# Altium PCB hat.PcbDoc (part 2 of 2)
Units mm, origin at the board's own origin, x right, y up, seen from the top; angles counter-clockwise.
Board outline 64 x 85 mm, 4 copper layers (Top Layer, Ground Plane, Power Plane, Bottom Layer), stack 0.844 mm thick; 120 components, 68 nets, 381 pads, 144 vias.
Unrouted connection lines stored in the file: 19.
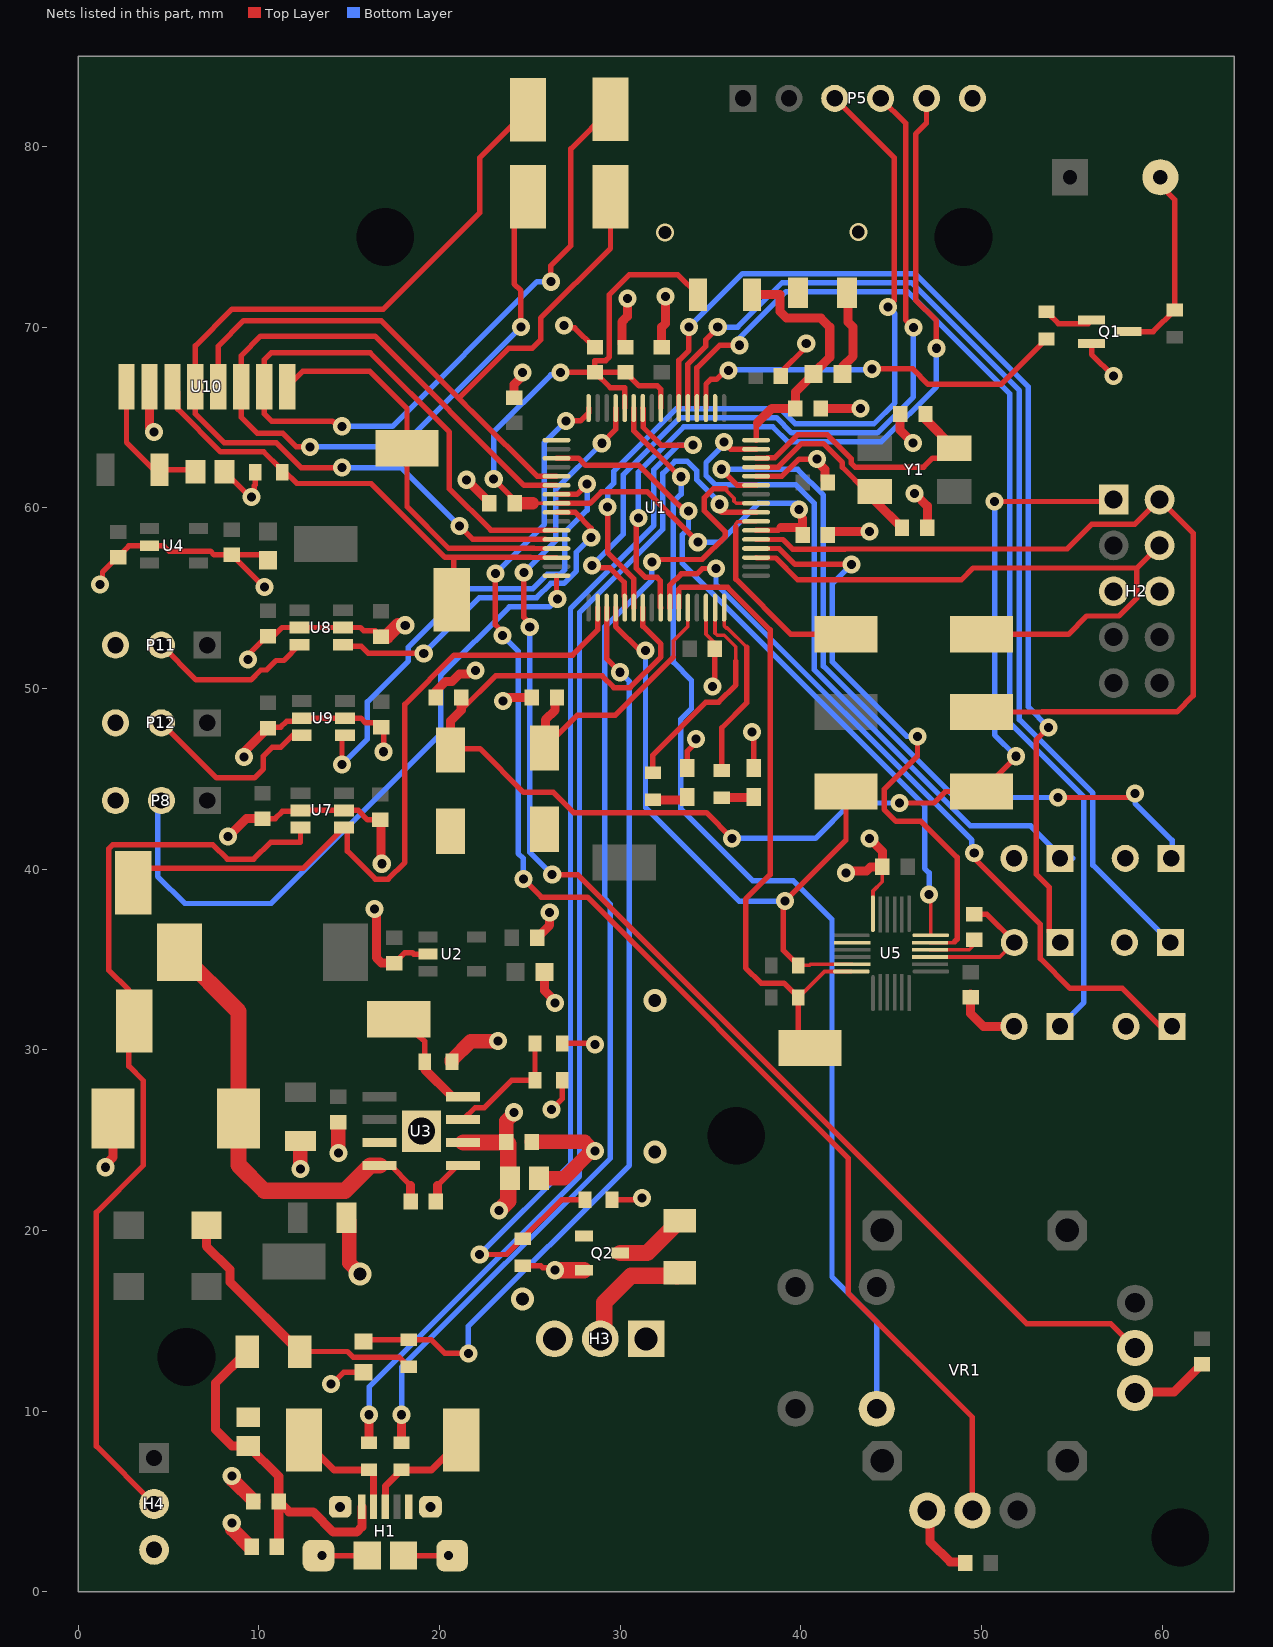
[diagram p4: the nets of this part, all layers, seen from the top]

## Via types
v1: diameter 1, hole 0.5, Top Layer to Bottom Layer, 136 vias
v2: diameter 1.27, hole 0.711, Top Layer to Bottom Layer, 4 vias
v3: diameter 1, hole 0.711, Top Layer to Bottom Layer, 2 vias
v4: diameter 1.3, hole 1.1, Top Layer to Bottom Layer, 1 vias
v5: diameter 2, hole 1.5, Top Layer to Bottom Layer, 1 vias

## Nets (pads, with @x,y where several pads share a name; then routed paths per layer and width w, separated by ;. In a path a pad name is that pad's centre, name@x,y a point inside that pad or via, vN(x,y) a via of type N, cw(c..) or ccw(c..) an arc to the next point about the centre after c; other vN are vias at no path point) (continued)
6V: C1.2 C30.2 Q2.2 R3.2 R29.2 R31.2 U3.2 | length 16.5
  Top Layer w0.3: R3.2@24.9,18.05 25.6,18.05 25.716,17.934 26.266,17.934 v1(26.4,17.8) ; v1(26.2,26.7) 26.785,27.285 R29.2@26.785,28.321
  Top Layer w0.8: R31.2@20.689,29.337 20.689,29.437 21.732,30.48 v1(23.241,30.48) ; C30.2@23.7,24.9 23.7,26.059 24.13,26.489 v1(24.13,26.543)
  Top Layer w0.9: U3.2@21.311,24.865 23.665,24.865 C30.2@23.7,24.9 23.8,24.8 23.8,23 C1.2@23.9,22.9 23.8,22.8 23.8,21.627 23.3,21.127 v1(23.3,21.1) ; v1(26.4,17.8) Q2.2@28,17.8
BAT_DIV: R3.1 R4.2 U1.10 | length 61.5
  Top Layer w0.3: v1(22.225,18.669) 23.719,18.669 R3.1@24.6,19.55 26.75,21.7 R4.2@28.05,21.7 ; U1.10@31.25,65.525 31.275,65.5 31.275,64.461 32.262,63.475 v1(34.036,63.475)
  Bottom Layer w0.3: v1(22.225,18.669) 27.25,23.694 27.25,54.42 31.859,59.029 31.859,62.115 33.219,63.475 v1(34.036,63.475)
BUZZER_PWM: R22.2 U1.3 | length 21.9
  Top Layer w0.3: U1.3@34.75,65.525 34.75,66.85 35.012,67.112 35.323,67.112 35.811,67.6 v1(36,67.6) ; v1(43.942,67.691) 46.201,67.691 47.051,66.841 51.091,66.841 R22.2@53.6,69.35
  Bottom Layer w0.3: v1(36,67.6) 36.045,67.645 43.896,67.645 v1(43.942,67.691)
CH1_SEL: P2.1 U1.63 | length 38.7
  Top Layer w0.3: v1(35.738,63.64) 36.127,63.25 U1.63@37.525,63.25
  Bottom Layer w0.3: v1(35.738,63.64) 35.738,63.5 34.75,62.512 34.75,61.784 35.248,61.286 39.716,61.286 40.75,60.252 40.75,51.034 49.384,42.4 52.716,42.4 53.916,41.2 54.44,41.2 P2.1@55.04,40.6
CH2_SEL: P3.1 U1.59 | length 42.9
  Top Layer w0.3: v1(35.6,62.136) 36.486,61.25 U1.59@37.525,61.25 ; v1(54.229,43.967) 58.267,43.967 v1(58.5,44.2)
  Bottom Layer w0.3: v1(35.6,62.136) 39.823,62.136 41.25,60.709 41.25,51.241 48.523,43.967 v1(54.229,43.967) ; v1(58.5,44.2) 58.5,43.647 60.554,41.593 60.554,40.846 P3.1@60.8,40.6
CH3_SEL: P4.1 U1.6 | length 60
  Top Layer w0.3: U1.6@33.25,65.525 33.25,68.164 33.8,68.714 v1(33.8,70) ; v1(53.721,47.854) 53.035,47.168 53.035,39.713 53.756,38.992 53.756,36.541 P4.1@54.356,35.941
  Bottom Layer w0.3: v1(33.8,70) 36.77,72.97 46.326,72.97 52.595,66.7 52.595,48.979 v1(53.721,47.854) ; P4.1@53.9,35.485 P4.1@54.356,35.941
CH4_SEL: P6.1 U1.5 | length 59.4
  Top Layer w0.3: U1.5@33.75,65.525 33.75,67.957 34.746,68.954 34.746,69.31 35.4,69.964 v1(35.4,70)
  Bottom Layer w0.3: v1(35.4,70) 36.501,70 38.971,72.47 46.119,72.47 52.095,66.493 52.095,48.277 56.165,44.208 56.165,40.228 P6.1@60.452,35.941
D_N: H1.2 R24.1 TP4.1 | length 6.4
  Top Layer w0.381: TP4.1@12.5,8.4 14.15,6.75 R24.1@16.1,6.75 16.35,6.5 H1.2@16.35,4.7
D_P: H1.3 R8.1 TP5.1 | length 6.4
  Top Layer w0.381: H1.3@17.009,4.691 H1.3@17,4.7 17,5.85 R8.1@17.9,6.75 19.55,6.75 TP5.1@21.2,8.4
FSYNC: U1.52 U5.11 | length 33.9
  Top Layer w0.2: U5.11@47.143,35.935 48.464,35.935 48.514,35.985
  Top Layer w0.3: U1.52@37.525,57.75 38.798,57.75 39.677,56.871 v1(42.799,56.871) ; v1(46.457,47.346) 46.457,46.257 44.616,44.416 44.616,43.311 45.277,42.65 46.652,42.65 48.65,40.652 48.65,36.121 48.514,35.985
  Bottom Layer w0.3: v1(42.799,56.871) 41.75,55.822 41.75,51.468 45.872,47.346 v1(46.457,47.346)
GND: C1.1 C2.1 C3.1 C4.1 C5.1 C6.1 C7.1 C8.1 C9.1 C10.1 C11.1 C12.1 C13.1 C14.1 C16.1 C17.1 C18.2 C19.1 C20.1 C21.1 C22.1 C23.1 C25.1 C26.1 C27.1 C28.1 C29.1 C30.1 C31.2 C32.1 C33.1 C34.2 C35.1 C36.2 C37.1 C38.2 C39.2 C40.2 C41.1 C42.1 D1.1 DL1.1 DL2.1 H1.5 H1.6 H2.5 H2.6 H3.1 H3.3 H4.3 P2.2 P3.2 P4.2 P5.6 P6.2 P7.2 P8.3 P11.3 P12.3 P13.2 pad.2@36.424,25.248 pad.2@49,75 Q1.2 Q2.1 R2.1 R4.1 R23.1 R27.1 R34.1 S1.1 S2.1 U1.2 U1.17 U1.46 U1.60 U2.2 U3.7 U3.EPAD U4.2 U5.9 U5.18 U5.20 U7.2 U7.5 U8.2 U8.5 U9.2 U9.5 U10.2 VR1.3 VR1.6 | length 163.8
  Top Layer w0.2: U1.46@34.75,54.475 34.75,52.998 35.201,52.547 35.244,52.547 C8.1@35.244,52.197 ; v1(35.1,50.1) v1@35.244,50.244 ; U5.18@43.993,37.535 43.993,38.789 44.512,39.309 C18.2@44.512,40.132 ; U5.9@47.411,35.135 51.01,35.135 P4.2@51.816,35.941 P4.2@51.816,35.982
  Top Layer w0.3: v1(1.21,55.763) 1.344,55.897 1.344,56.447 2.16,57.263 C16.1@2.21,57.263 ; C16.1@2.1,57.2 2.8,57.9 U4.2@3.95,57.9 4.725,57.9 5.025,57.6 7.32,57.6 7.52,57.4 C23.1@8.5,57.4 ; C21.1@8.1,62.5 C21.1@8.1,62 9.5,60.6 v1(9.6,60.6) 9.734,60.734 9.734,61.219 9.791,61.276 R27.1@9.791,61.976 ; C23.1@8.8,57.15 C23.1@8.55,57.4 ; v1(9.403,51.6) 9.537,51.734 9.537,51.984 C34.2@10.453,52.9 ; C38.2@10.203,42.8 10.903,42.8 11.303,43.2 12.253,43.2 U7.2@12.303,43.25 U7.5@14.703,43.25 15.503,43.25 16.019,42.734 C37.1@16.713,42.734 ; v1(10.312,55.626) 10.274,55.626 C23.1@8.5,57.4 ; C36.2@10.377,47.858 11.206,47.858 11.531,48.183 12.202,48.183 U9.2@12.377,48.358 U9.5@14.777,48.358 15.645,48.358 15.903,48.1 16.535,48.1 C35.1@16.777,47.858 16.903,47.732 v1(16.903,46.5) ; C34.2@10.403,52.9 C34.2@10.453,52.9 ; C17.1@10.5,57.1 10.2,57.4 C23.1@8.55,57.4 ; H1.6@13.5,2 H1.6@16,2 ; v1(14,11.5) 14.043,11.5 14.693,12.15 R2.1@15.8,12.15 ; C33.1@16.756,52.875 16.431,53.2 15.803,53.2 15.628,53.375 U8.5@14.656,53.375 U8.2@12.256,53.375 11.279,53.375 10.803,52.9 C34.2@10.503,52.9 C34.2@10.453,52.9 ; C3.1@17.5,34.8 18.077,35.377 18.498,35.377 18.575,35.3 U2.2@19.35,35.3 ; H1.6@18,2 H1.6@20.5,2 ; R34.1@26.785,30.353 28.547,30.353 v1(28.6,30.3) ; v1(26.9,70.1) 27.034,69.966 27.484,69.966 28.55,68.9 C11.1@28.6,68.9 ; R4.1@29.55,21.7 31.1,21.7 v1(31.2,21.8) ; DL2.1@33.717,45.6 33.717,46.528 34.2,47.011 v1(34.2,47.2) ; v1@35.244,50.244 C8.1@35.244,52.197 ; v1(37.3,47.6) 37.4,47.5 DL1.1@37.4,45.6 ; U1.60@37.525,61.75 38.955,61.75 39.905,62.7 40.765,62.7 v1@40.9,62.565 ; C5.1@38.9,67.3 38.9,67.511 40.3,68.911 v1(40.3,69.1) v1@40.111,69.1 ; v1@43.2,65.5 v1(43.3,65.5) ; C20.1@49.6,37.498 50.3,37.498 P4.2@51.816,35.982 ; Q1.2@56.1,69.1 56.1,68.5 v1(57.3,67.3) ; C23.1@8.5,57.4 C23.1@8.55,57.4
  Top Layer w0.5: v1(1.5,23.5) 1.5,23.635 1.925,24.06 D1.1@1.925,26.2 ; U10.2@3.943,66.7 3.943,64.457 v1(4.2,64.2) ; v1(8.303,41.8) 9.303,42.8 C38.2@10.203,42.8 ; v1(9.169,46.203) 9.169,46.466 C36.2@10.503,47.8 ; v1(16.4,37.8) 16.5,37.7 16.5,35.1 16.8,34.8 C3.1@17.5,34.8 ; v1@16.555,40.345 v1@16.6,40.3 ; C37.1@16.713,42.734 16.758,42.689 v1@16.758,40.345 ; C39.2@19.803,49.5 19.803,49.85 20.353,50.4 20.703,50.4 21.103,50.8 21.614,50.8 21.814,51 v1(22.003,51) ; v1(21.5,61.554) 22.755,60.299 C12.1@22.755,60.249 ; v1(23.503,49.3) 23.603,49.3 23.803,49.5 C40.2@25.103,49.5 ; C7.1@24.13,66.105 24.13,66.841 24.6,67.311 v1(24.6,67.5) ; C22.1@25.4,36.2 26.1,36.9 v1(26.1,37.6) ; C4.1@25.8,34.3 25.8,33.289 26.4,32.689 v1(26.4,32.595) v1@26.4,32.405 ; C10.1@30.3,68.9 30.1,69.1 30.1,70.3 30.4,70.6 v1(30.4,71.6) ; C6.1@32.3,68.9 32.3,70 32.5,70.2 v1(32.5,71.7) ; v1@40.9,62.565 41.35,62.115 41.35,61.55 C9.1@41.5,61.4 ; C14.1@41.1,65.5 v1@43.2,65.5 ; C13.1@41.5,58.5 41.7,58.7 v1(43.8,58.7) ; v1(42.5,39.8) 42.596,39.896 43.626,39.896 43.862,40.132 C18.2@44.512,40.132 44.512,40.988 v1(43.8,41.7) ; C2.1@45.5,65.2 45.5,64.3 v1(46.2,63.6) ; v1(46.3,60.8) 47,60.1 C25.1@47,58.9 ; VR1.6@47,4.5 47.161,4.339 47.161,2.75 48.26,1.651 49.049,1.651 C32.1@49.1,1.6 ; C19.1@49.4,33.1 49.4,32 50.1,31.3 P7.2@51.8,31.3 ; VR1.3@58.5,11 58.55,11.05 60.65,11.05 C41.1@62.2,12.6
  Top Layer w0.8: v1(8.5,3.8) 8.538,3.762 8.538,3.462 C29.1@9.5,2.5 ; v1(8.5,6.4) 8.538,6.362 8.538,6.212 9.7,5.05 C28.1@9.7,5 ; v1(12.3,23.4) C26.1@12.3,24.95 ; v1(14.4,24.3) C31.2@14.4,26 ; C27.1@14.85,20.7 15,20.55 15,18.2 v2(15.6,17.6) ; C33.1@16.756,52.875 17.079,52.875 17.703,53.5 v1(18.103,53.5) ; C30.1@25.1,24.9 28.046,24.9 v1@28.546,24.4 ; C1.1@25.5,22.9 26.9,22.9 28.4,24.4 v1@28.546,24.4 ; v1(28.6,24.4) v1@28.546,24.4
  other v1: 16.803,40.3 40.9,62.7
  other v2: 24.6,16.2 31.916,24.334 31.916,32.734
  other v3: 32.487,75.235 43.18,75.26
  other v5: 19,25.5
GPIO_JUMPER: P13.1 U1.42 | length 42.9
  Top Layer w0.3: U1.42@32.75,54.475 32.75,55.717 33.383,56.35 34.252,56.35 34.544,56.642 v1(35.306,56.642) ; v1(49.6,40.9) 49.6,40.6 53.256,36.944 53.256,35.046 54.902,33.4 57.8,33.4 60,31.2 P13.1@60.5,31.2
  Bottom Layer w0.3: v1(35.306,56.642) 35.306,55.771 49.466,41.611 49.466,41.034 v1(49.6,40.9) ; P13.1@60.54,31.3 P13.1@61.14,31.9
IMU_IRQ: U1.19 U5.12 | length 38.2
  Top Layer w0.2: v1(47.1,38.6) 47.193,38.507 U5.12@47.193,36.335
  Top Layer w0.3: U1.19@26.475,62.75 27.686,62.75 28.079,62.357 31.031,62.357 33.201,60.186 33.223,60.186 33.593,59.817 v1(33.782,59.817)
  Bottom Layer w0.3: v1@33.445,59.684 33.649,59.684 v1(33.782,59.817) 33.782,58.855 33.445,58.518 33.445,56.924 46.85,43.52 46.85,40.048 47.1,39.798 v1(47.1,38.6)
IMU_JOY_SEL: P7.1 U1.4 | length 61.1
  Top Layer w0.3: U1.4@34.25,65.525 34.25,67.75 35.5,69 v1(36.6,69)
  Bottom Layer w0.3: v1(36.6,69) 36.6,69.391 39.179,71.97 45.911,71.97 51.574,66.308 51.574,48.092 55.665,44 55.665,32.625 P7.1@54.34,31.3
JSSW: U1.11 VR1.7 | length 63.2
  Top Layer w0.3: U1.11@30.75,65.525 30.75,64.279 33.307,61.722 v1(33.376,61.722)
  Bottom Layer w0.3: v1(33.376,61.722) 33.376,60.758 32.932,60.314 32.932,57.594 32.944,57.582 32.944,51.458 33.95,50.452 33.95,48.888 33.35,48.288 33.35,43.348 37.328,39.37 39.573,39.37 41.724,37.219 41.724,17.437 44.2,14.961 VR1.7@44.2,10.13
LED_DATA_3V3: TP14.1 U1.34 U7.4 | length 40.9
  Top Layer w0.3: TP14.1@3.05,39.25 3.85,40.05 12.453,40.05 U7.4@14.703,42.3 14.903,42.1 14.903,40.998 16.451,39.45 17.155,39.45 18.077,40.371 18.077,49.118 20.808,51.85 27.364,51.85 28.75,53.237 U1.34@28.75,54.475
LED_DATA_5V: H4.2 TP15.1 U7.3 | length 51.7
  Top Layer w0.3: H4.2@4.2,4.86 1,8.06 1,21 3.6,23.6 3.6,28.3 2.8,29.1 2.8,33.3 1.7,34.4 1.7,41.145 1.905,41.35 7.451,41.35 8.251,40.55 9.714,40.55 10.664,41.5 12.303,41.5 U7.3@12.303,42.3
MISO: TP23.1 U1.27 U10.7 | length 55.6
  Top Layer w0.3: v1(14.605,64.516) 14.351,64.516 14.067,64.8 10.7,64.8 10.3,65.2 U10.7@10.3,66.7 10.3,68.2 10.68,68.58 16.165,68.58 20.55,64.195 20.55,61.05 22.837,58.763 26.462,58.763 U1.27@26.475,58.75 ; v1(26.162,72.517) 26.162,73.406 27.269,74.513 27.269,79.872 TP23.1@29.464,82.067
  Bottom Layer w0.3: v1(14.605,64.516) 17.399,64.516 25.4,72.517 v1(26.162,72.517)
MOSI: TP18.1 U1.22 U10.6 | length 51.3
  Top Layer w0.3: v1(12.827,63.373) 12.079,63.373 11.317,64.135 9.906,64.135 9.029,65.012 U10.6@9.029,66.7 9.029,68.429 10.1,69.5 16.424,69.5 24.674,61.25 U1.22@26.475,61.25 ; v1(24.5,70) 24.5,72.02 24.13,72.39 24.13,76.454 TP18.1@24.892,77.216
  Bottom Layer w0.3: v1(12.827,63.373) 17.873,63.373 v1(24.5,70)
NetC2_2: C2.2 U1.62 Y1.3 | length 15.1
  Top Layer w0.3: U1.62@37.525,62.75 38.125,62.75 38.15,62.775 38.557,62.775 39.832,64.05 41.459,64.05 42.8,62.709 42.8,62.455 43.005,62.25 46.8,62.25 47.3,62.75 47.95,62.75 Y1.3@48.5,63.3
  Top Layer w0.5: C2.2@46.9,64.9 Y1.3@48.5,63.3
NetC10_2: C10.2 C11.2 C12.2 C13.2 L1.2 U1.8 U1.12 U1.24 U1.54 | length 52.2
  Top Layer w0.2: 25.146,60.249 25.147,60.25 U1.24@26.475,60.25
  Top Layer w0.3: v1(23,61.6) 24.155,60.445 C12.2@24.155,60.249 ; U1.24@26.475,60.25 28.322,60.25 28.957,60.885 31.507,60.885 v1(34.295,58.097) ; v1(26.7,67.5) C11.2@28.6,67.5 ; U1.12@30.25,65.525 30.25,66.65 29.45,66.65 C11.2@28.6,67.5 ; U1.8@32.25,65.525 32.25,66.56 32.06,66.75 31.05,66.75 C10.2@30.3,67.5 C11.2@28.6,67.5 ; L1.2@34.3,71.8 33.2,72.9 30.498,72.9 29.4,71.802 29.4,68.355 29.195,68.15 28.6,68.15 C11.2@28.6,67.5 ; U1.54@37.525,58.75 38.75,58.75 38.9,58.9 ; v1(39.9,59.9) 39.9,59.6 40.1,59.4
  Top Layer w0.5: 38.9,58.9 C13.2@39.8,58.9 ; C13.2@40.1,58.5 40.1,59.4
  Top Layer w0.6: C12.2@24.155,60.249 C12.2@24.157,60.25
  Top Layer w0.7: C12.2@24.157,60.25 25.147,60.25
  Bottom Layer w0.3: v1(23,61.6) 23,64.202 26.164,67.366 26.566,67.366 v1(26.7,67.5) ; v1(34.295,58.097) 35.497,58.097 35.541,58.141 37.65,60.25 v1@39.8,60.25
NetC14_2: C14.2 C15.2 L1.1 U1.64 | length 14.3
  Top Layer w0.3: U1.64@37.525,63.75 37.525,64.625 37.6,64.7
  Top Layer w0.5: L1.1@37.3,71.8 38.85,71.8 38.85,70.864 39.214,70.5 41.107,70.5 41.6,70.007 41.6,68.336 40.7,67.436 C15.2@40.7,67.4 39.7,66.4 C14.2@39.7,65.5 38.4,65.5 37.6,64.7
NetC15_1: C15.1 R23.2 | length 4.9
  Top Layer w0.5: C15.1@42.3,67.4 42.3,67.8 42.9,68.4 42.9,70 42.6,70.3 42.6,71.85 R23.2@42.55,71.9
NetC20_2: C20.2 U5.10 | length 2.7
  Top Layer w0.2: U5.10@47.143,35.535 49.316,35.535 C20.2@49.657,35.876
NetC21_2: C21.2 L3.1 U10.1 | length 7.6
  Top Layer w0.3: U10.1@2.671,66.7 2.671,63.629 4.2,62.1 L3.1@4.5,62.1 6.4,62.1 C21.2@6.5,62
NetC24_1: C24.1 U3.1 | length 2.8
  Top Layer w0.3: C24.1@19.8,21.6 C24.1@19.9,21.7 ; 19.9,22.5 20.995,23.595 U3.1@21.311,23.595
  Top Layer w0.5: C24.1@19.9,21.7 19.9,22.5
NetC24_2: C24.2 D1.2 L2.1 U3.8 | length 25.2
  Top Layer w0.3: U3.8@16.689,23.595 17.305,23.595 18.4,22.5
  Top Layer w0.5: C24.2@18.4,21.6 18.4,22.5
  Top Layer w0.9: L2.1@5.6,35.4 8.875,32.125 D1.2@8.875,26.2 8.875,23.625 10.3,22.2 14.769,22.2 16.164,23.595 U3.8@16.689,23.595
NetC25_2: C25.2 U1.61 Y1.1 | length 11
  Top Layer w0.3: U1.61@37.525,62.25 38.739,62.25 40.039,63.55 41.252,63.55 42.3,62.502 42.3,62.248 43.648,60.9 Y1.1@44.1,60.9
  Top Layer w0.5: Y1.1@44.1,60.9 44.1,60.4 C25.2@45.6,58.9
NetD2_2: D2.2 F2.1 R1.2 | length 15.5
  Top Layer w0.3: F2.1@12.25,13.3 14.905,13.3 15.228,12.977 17.773,12.977 R1.2@18.3,12.45
  Top Layer w0.5: D2.2@7.1,20.3 7.1,19.136 8.39,17.846 8.39,17.16 F2.1@12.25,13.3
NetDL1_2: DL1.2 R5.1 | length 1.8
  Top Layer w0.3: DL1.2@37.361,43.961 DL1.2@37.4,44
  Top Layer w0.5: R5.1@35.622,43.961 DL1.2@37.361,43.961
NetDL2_2: DL2.2 R6.1 | length 2
  Top Layer w0.3: DL2.2@33.551,43.834 DL2.2@33.717,44 DL2.2@33.717,44.05
  Top Layer w0.5: R6.1@31.812,43.834 DL2.2@33.551,43.834
NetF1_1: F1.1 H3.2 | length 7.2
  Top Layer w0.9: H3.2@28.9,14 29.117,14.217 29.117,16.017 30.6,17.5 F1.1@33.15,17.5
  Top Layer w1: H3.2@28.9,14 H3.2@28.9,14.279 ; F1.1@33.15,17.5 F1.1@33.3,17.65
NetF1_2: F1.2 Q2.3 | length 4
  Top Layer w0.9: Q2.3@30,18.75 31.5,18.75 F1.2@33.3,20.55
NetP9_2: P9.2 Q1.3 R21.1 | length 10.8
  Top Layer w0.3: Q1.3@58.1,69.75 59.5,69.75 R21.1@60.7,70.95 60.7,77.049 59.9,77.849 P9.2@59.9,78.3
NetQ1_1: Q1.1 R22.1 | length 2.9
  Top Layer w0.3: R22.1@53.6,70.85 54.25,70.2 55.9,70.2 Q1.1@56.1,70.4
NetR8_2: R8.2 U1.57 | length 65.6
  Top Layer w0.2: 35.852,61.05 35.852,60.979 36.3,60.531 36.3,60.367 36.417,60.25 U1.57@37.525,60.25
  Top Layer w0.3: v1(31.75,56.998) 31.894,57.142 34.542,57.142 35.825,58.425 35.825,58.673 34.65,59.848 34.65,60.552 35.148,61.05 35.852,61.05
  Top Layer w0.5: R8.2@17.9,8.25 v1(17.9,9.8)
  Bottom Layer w0.3: v1(17.9,9.8) 17.9,12.435 29.45,23.985 29.45,38.067 29.15,38.367 29.15,53.407 31.75,56.007 v1(31.75,56.998)
NetR24_2: R24.2 U1.56 | length 67.5
  Top Layer w0.3: v1(35.5,60.2) 35.5,59.87 35.62,59.75 U1.56@37.525,59.75
  Top Layer w0.5: R24.2@16.1,8.25 v1(16.1,9.8)
  Bottom Layer w0.3: v1(16.1,9.8) 16.1,11.342 27.75,22.992 27.75,54.213 32.359,58.822 32.359,61.908 33.024,62.572 33.728,62.572 34.25,62.05 34.25,61.542 35.5,60.292 v1(35.5,60.2)
NetR29_1: R29.1 R34.2 U3.3 | length 6.9
  Top Layer w0.3: U3.3@21.311,26.135 21.977,26.801 22.483,26.801 24.003,28.321 R29.1@25.285,28.321 R34.2@25.285,30.353
NetR31_1: R31.1 TP10.1 U3.4 | length 7.7
  Top Layer w0.3: TP10.1@17.739,31.692 18.67,31.692 TP10.1@18.87,31.492 ; TP10.1@17.907,31.75 17.808,31.75 17.67,31.75 17.808,31.633 19.189,30.468 R31.1@19.189,29.337 ; U3.4@20.695,27.405 U3.4@21.311,27.405
  Top Layer w0.5: R31.1@19.189,29.337 19.189,28.911 U3.4@20.695,27.405
NetTP2_1: TP2.1 U1.55 | length 11.6
  Top Layer w0.2: 36.4,58.947 36.4,59.123 36.517,59.24 37.515,59.24 U1.55@37.525,59.25
  Top Layer w0.3: 36.4,58.947 36.4,56.553 36.4,56.053 39.453,53 TP2.1@42.5,53
nRST: C39.1 H2.1 S1.2 TP19.1 U1.39 | length 75.9
  Top Layer w0.3: S1.2@20.603,46.798 20.474,46.669 22.234,46.669 24.652,44.251 26.307,44.251 27.424,43.134 34.766,43.134 v1(36.2,41.7) ; 21.203,48.8 23.102,50.698 29,50.698 29.648,50.05 30.552,50.05 32.25,51.748 32.25,52.452 31.25,53.452 U1.39@31.25,54.475 ; v1(45.466,43.663) 47.363,43.663 48,44.3 TP19.1@50,44.3 51.9,46.2 v1(51.9,46.25) ; v1(50.724,60.35) 57.206,60.35 H2.1@57.316,60.46
  Top Layer w0.5: S1.2@20.603,46.798 20.603,48.2 21.203,48.8 C39.1@21.203,49.5
  Bottom Layer w0.3: v1(36.2,41.7) 40.8,41.7 42.763,43.663 v1(45.466,43.663) ; v1(50.724,60.35) 50.724,47.426 v1(51.9,46.25) ; H2.1@57.206,60.35 H2.1@57.316,60.46
PA27: P5.4 U1.37 | length 45.1
  Top Layer w0.3: v1(28.448,56.82) 28.582,56.686 29.42,56.686 30.225,55.881 30.225,55.1 30.25,55.075 U1.37@30.25,54.475 ; P5.4@44.418,82.668 45.796,81.29 45.796,70.409 v1(46.228,69.977)
  Bottom Layer w0.3: v1(28.448,56.82) 30.159,58.531 30.159,59.796 30.159,61.829 33.32,64.99 38.652,64.99 39.491,64.15 44.243,64.15 46.228,66.135 v1(46.228,69.977)
PA28: P5.3 U1.38 | length 44.6
  Top Layer w0.3: v1(29.309,60.035) 29.309,57.529 30.75,56.088 U1.38@30.75,54.475 ; P5.3@41.878,82.668 45.161,79.385 45.161,71.45 v1(44.831,71.12)
  Bottom Layer w0.3: v1(29.309,60.035) 29.309,61.021 29.642,61.354 29.642,62.019 33.113,65.49 38.859,65.49 39.698,64.65 44.036,64.65 45.2,65.814 45.2,70.751 v1(44.831,71.12)
PA29: P5.5 U1.41 | length 44.3
  Top Layer w0.3: v1(31.009,59.444) 30.9,59.335 30.9,56.646 31.398,56.148 32.041,56.148 32.225,55.964 32.225,54.5 U1.41@32.25,54.475 ; P5.5@46.958,82.668 46.958,81.296 46.355,80.692 46.355,71.501 47.498,70.358 v1(47.498,68.834)
  Bottom Layer w0.3: v1(31.009,59.444) 31.009,61.972 33.527,64.49 38.444,64.49 39.284,63.65 44.45,63.65 47.498,66.698 v1(47.498,68.834)
RADIO_CE: R27.2 TP22.1 U1.30 U10.3 | length 28
  Top Layer w0.3: U10.3@5.214,66.7 5.514,66.4 5.514,65.464 7.882,63.096 10.271,63.096 R27.2@11.197,62.17 ; R27.2@11.297,61.947 R27.2@11.297,62.07 ; R27.2@11.4,62.05 12.101,61.349 16.215,61.349 20.301,57.263 20.777,57.263 ; TP22.1@20.676,54.915 20.777,55.016 20.777,57.263 ; U1.30@26.475,57.25 25.029,57.25 25.015,57.263 20.777,57.263
RADIO_IRQ: TP21.1 U1.29 U10.8 | length 22.5
  Top Layer w0.3: U10.8@11.571,66.7 12.435,67.564 16.129,67.564 18.2,65.493 TP21.1@18.2,63.3 18.2,60.071 20.508,57.763 25.223,57.763 25.236,57.75 U1.29@26.475,57.75
SCL: R19.1 TP7.1 U1.36 U5.23 | length 36.2
  Top Layer w0.2: R19.1@39.866,34.671 40.466,34.671 40.53,34.735 U5.23@42.843,34.735
  Top Layer w0.3: U1.36@29.75,54.475 29.75,53.436 31.086,52.1 v1(31.4,52.1) ; R19.1@39.866,34.671 39.028,35.509 39.028,38.139 v1(39.116,38.227) 42.5,41.611 TP7.1@42.5,44.3
  Bottom Layer w0.3: v1(31.4,52.1) 31.4,43.403 36.576,38.227 v1(39.116,38.227)
SDA: R18.1 TP6.1 U1.43 U5.24 | length 36.5
  Top Layer w0.2: R18.1@39.866,32.893 41.308,34.335 U5.24@42.793,34.335
  Top Layer w0.3: U1.43@33.25,54.475 33.25,55.51 33.34,55.6 35.947,55.6 38.3,53.247 38.3,39.698 36.95,38.348 36.95,34.541 37.798,33.693 39.066,33.693 R18.1@39.866,32.893 39.866,30.734 TP6.1@40.5,30.1
SERVO_PWM: P8.2 U1.32 | length 37.2
  Top Layer w0.3: U1.32@26.475,56.25 26.475,55.008 v1(26.518,54.966)
  Bottom Layer w0.3: P8.2@4.603,43.8 4.4,43.597 4.4,39.6 5.9,38.1 10.676,38.1 20.066,47.49 20.066,50.724 23.867,54.525 26.077,54.525 v1(26.518,54.966)
SIG_1_3V3: U1.25 U8.4 | length 20
  Top Layer w0.3: U8.4@14.656,52.425 14.734,52.347 15.656,52.347 16.06,51.943 v1(19.126,51.943) ; U1.25@26.475,59.75 27.514,59.75 28.397,58.867 v1(28.397,58.369)
  Bottom Layer w0.3: v1(19.126,51.943) 22.208,55.025 22.517,55.025 22.529,55.013 23.648,55.013 23.66,55.025 25.375,55.025 26.166,55.816 26.883,55.816 27.573,56.505 27.573,57.545 v1(28.397,58.369)
SIG_1_5V: P11.2 U8.3 | length 9.5
  Top Layer w0.3: P11.2@4.803,52.4 P11.2@4.603,52.4 6.525,50.478 9.559,50.478 10.104,51.024 10.425,51.024 10.951,51.55 11.381,51.55 U8.3@12.256,52.425
SIG_2_3V3: U1.23 U9.4 | length 27.3
  Top Layer w0.3: v1(14.603,45.8) 14.603,47.235 U9.4@14.777,47.408 ; U1.23@26.475,60.75 27.603,60.75 v1(28.169,61.316)
  Bottom Layer w0.3: v1(14.603,45.8) 16.003,47.2 16.003,49.256 18.276,51.529 18.276,52.295 21.506,55.525 22.724,55.525 22.737,55.513 23.441,55.513 23.453,55.525 25.168,55.525 25.958,56.316 26.676,56.316 26.924,56.564 26.924,58.624 28.169,59.869 v1(28.169,61.316)
SIG_2_5V: P12.2 U9.3 | length 10.4
  Top Layer w0.3: P12.2@4.603,48.1 7.653,45.05 9.753,45.05 10.253,45.55 10.253,46.252 10.751,46.75 11.215,46.75 11.874,47.408 U9.3@12.377,47.408
SLEEP: C40.1 S2.2 U1.44 | length 15.3
  Top Layer w0.2: S2.2@25.857,46.754 S2.2@26.503,47.4 ; 32.951,51.742 32.951,52.641 33.75,53.44 U1.44@33.75,54.475
  Top Layer w0.3: S2.2@26.503,47.4 27.617,48.514 29.723,48.514 32.951,51.742
  Top Layer w0.5: S2.2@25.808,46.705 25.857,46.754 25.857,48.26 26.397,48.8 26.397,49.394 C40.1@26.503,49.5
SPCK: TP17.1 U1.21 U10.5 | length 40.5
  Top Layer w0.3: U10.5@7.757,66.7 7.757,68.957 9.158,70.358 16.77,70.358 21.098,66.03 ; 21.784,65.345 21.098,66.03 ; 21.8,65.329 21.975,65.155 25.4,61.75 U1.21@26.475,61.75 ; TP17.1@29.464,77.216 29.464,74.364 25.6,70.5 25.6,69.3 25.124,68.824 23.824,68.824 21.098,66.098 21.098,66.03
SPI_CSN: TP16.1 U1.28 U10.4 | length 52.2
  Top Layer w0.3: v1(14.605,62.23) 12.332,62.23 10.966,63.596 8.089,63.596 6.486,65.2 U10.4@6.486,66.7 6.486,68.97 8.516,71 16.898,71 22.225,76.327 22.225,79.375 TP16.1@24.892,82.042 ; v1(21.1,59) 21.837,58.263 25.85,58.263 25.863,58.25 U1.28@26.475,58.25
  Bottom Layer w0.3: v1(14.605,62.23) 17.87,62.23 v1(21.1,59)
STAT0: R5.2 U1.48 | length 10.1
  Top Layer w0.2: U1.48@35.75,54.475 35.76,54.465 35.76,53.464 35.877,53.347 35.934,53.347 37,52.281
  Top Layer w0.3: R5.2@35.622,45.461 35.622,47.822 37,49.2 37,52.281
STAT1: R6.2 U1.47 | length 12.2
  Top Layer w0.2: U1.47@35.25,54.475 35.25,53.064 35.367,52.947 35.768,52.947 36.4,52.315 36.4,51.5
  Top Layer w0.3: R6.2@31.812,45.334 31.812,46.314 34.748,49.25 35.452,49.25 36.4,50.198 36.4,51.5
SWCLK: H2.2 TP20.1 U1.53 | length 47.4
  Top Layer w0.3: U1.53@37.525,58.25 39.005,58.25 39.555,57.7 42.426,57.7 42.447,57.721 54.737,57.721 56.111,59.095 58.491,59.095 H2.2@59.856,60.46 61.716,58.6 61.716,49.6 60.82,48.704 53.369,48.704 53.365,48.7 TP20.1@50,48.7
SWDIO: H2.4 TP3.1 U1.51 | length 34.7
  Top Layer w0.3: U1.51@37.525,57.25 37.55,57.225 38.616,57.225 39.82,56.021 48.888,56.021 49.537,56.669 58.605,56.669 ; TP3.1@50,53 54.807,53 55.822,54.015 57.613,54.015 58.605,55.007 58.605,56.669 ; H2.4@59.856,57.92 58.605,56.669
USB_DETECT: R1.1 R2.2 U1.35 | length 51.6
  Top Layer w0.3: R2.2@15.8,13.85 15.9,13.95 R1.1@18.3,13.95 19.55,13.95 20.3,13.2 v1(21.6,13.2) ; U1.35@29.25,54.475 29.25,51.65 v1(30,50.9)
  Bottom Layer w0.3: v1(21.6,13.2) 21.6,14.7 30.505,23.605 30.505,50.395 v1(30,50.9)
VBUS: C28.2 C29.2 C42.2 F2.2 H1.1 | length 20
  Top Layer w0.5: F2.2@9.35,13.3 7.595,11.545 7.595,8.993 8.523,8.065 C42.2@9.423,8.065 11.1,6.388 C28.2@11.1,5 ; C29.2@11.1,2.5 C28.2@11.1,5 ; H1.1@15.7,4.7 15.7,3.593 15.407,3.3 14.13,3.3 13.007,4.423 11.677,4.423 C28.2@11.1,5
VRX: U1.13 VR1.2 | length 71.7
  Top Layer w0.3: v1(24.663,56.413) 24.663,53.936 24.994,53.606 v1(24.994,53.416) ; v1(26.238,39.7) 27.641,39.7 52.508,14.834 57.166,14.834 VR1.2@58.5,13.5 ; v1(28.981,63.576) 29.75,64.345 U1.13@29.75,65.525
  Bottom Layer w0.3: v1(24.663,56.413) 26.424,58.174 26.424,61.019 v1(28.981,63.576) ; v1(24.994,53.416) 24.994,40.945 v1(26.238,39.7)
VRY: U1.16 VR1.5 | length 76.1
  Top Layer w0.3: v1(23.089,56.363) 23.089,53.529 23.495,53.123 v1(23.495,52.934) ; v1(24.638,39.446) 25.634,38.45 28.185,38.45 42.621,24.013 42.621,16.54 49.5,9.661 VR1.5@49.5,4.5 ; v1(27.009,64.812) 27.798,64.812 28.25,65.264 U1.16@28.25,65.525
  Bottom Layer w0.3: v1(23.089,56.363) 25.806,59.08 25.806,63.609 v1(27.009,64.812) ; v1(23.495,52.934) 24.353,52.075 24.353,40.878 24.638,40.593 v1(24.638,39.446)
pads on no net: H1.4 H2.3 H2.9 H2.10 U1.9 U1.14 U1.15 U1.20 U1.26 U1.31 U1.33 U1.40 U1.49 U1.50 U2.4 U3.6 U4.4 U5.2 U5.3 U5.4 U5.5 U5.6 U5.7 U5.14 U5.15 U5.16 U5.17 U5.19 U5.21 VR1.9 VR1.10 VR1.11 VR1.12 VR1.13 VR1.14 Y1.2 Y1.4
copper on no net:
  other v4: 44.993,35.335

## Polygon pours and split planes (outlines as drawn)
GND on Top Layer "Top Layer-GND" (solid, remove dead copper, pour order 20): -4.851,65.024 -4.928,64.948 -4.928,-3.785 70.053,-3.785 70.002,-3.734 70.002,88.57 23.292,88.57 23.292,64.948
no net on Top Layer "Top Layer-No Net 1" (solid, pour order 18): 93.777,58.572
no net on Top Layer "Top Layer-No Net" (solid, pour order 12): 58.3,97.1
GND on Ground Plane (split plane): 63.49,0.51 0.51,0.51 0.51,65.01 0.6,65.1 23.2,65.1 23.2,84.49 63.49,84.49
5V_LP on Power Plane (split plane): 13.271,44.5 13.28,44.45 13.308,44.408 18.708,39.008 18.75,38.98 18.8,38.971 21.842,38.971 21.842,30 21.842,15.8 21.851,15.75 21.879,15.708 21.921,15.68 21.971,15.671 28.971,15.671 28.971,0.51 0.51,0.51 0.51,65 13.271,65.056
3V3D on Power Plane (split plane): 63.49,0.51 29.229,0.51 29.229,15.8 29.229,31.496 29.22,31.546 29.192,31.588 29.15,31.616 29.1,31.625 22.1,31.625 22.1,39.1 22.091,39.15 22.063,39.192 22.021,39.22 21.971,39.229 18.854,39.229 13.529,44.554 13.529,65.057 21.843,65.094 21.851,65.05 21.879,65.008 21.921,64.98 21.971,64.971 22.021,64.98 22.063,65.008 22.091,65.05 22.1,65.095 23.2,65.1 23.2,84.49 63.49,84.49
6V on Power Plane (split plane): 28.971,15.929 22.1,15.929 22.1,30 22.1,31.367 28.971,31.367

## Other copper
Bottom Layer:
  pour cut-out: 0.541,84.426 23.341,84.426 23.241,84.326 23.241,65.026 0.641,65.026 0.541,64.926
Ground Plane (plane layer: these items are gaps in the copper):
  pour cut-out: 0.5,84.5 23.2,84.5 23.2,65.1 0.6,65.1 0.5,65
Power Plane (plane layer: these items are gaps in the copper):
  pour cut-out: 0.3,84.6 23.2,84.6 23.2,65.1 0.5,65
  region: 21.3,0.9
  lines w0.254: 13.4,65.1 13.4,44.5 18.8,39.1 21.971,39.1 21.971,30 21.971,15.8 29.1,15.8 ; 22,31.496 29.1,31.496 29.1,15.8 ; 29.1,0 29.1,15.8 ; 21.971,65.1 21.971,65.1

## Silkscreen, mask and mechanical layers (free items; w line width, h text height)
Top Overlay:
  lines w0.254: 31.916,24.334 31.916,32.734 ; 32.487,75.235 43.18,75.26
  lines w0.3: 15.6,17.6 24.6,16.2
  text "HAT PCB" at 14.746,81.524 h0.8
  text "GROUP 20" at 14.376,80.086 h0.8
  text "A. Musalov" at 13.767,78.74 h0.8
  text "GND" at 50.098,78.476 h0.8 r90
  text "PA27" at 44.631,77.832 h0.8 r90
  text "3V3D" at 37.051,77.747 h0.8 r90
  text "PA28" at 42.345,77.705 h0.8 r90
  text "PA29" at 47.298,77.705 h0.8 r90
  text "3V3D" at 39.798,77.676 h0.8 r90
  text "A. Eason" at 14.402,77.394 h0.8
  text "GND" at 36.576,75.946 h0.8
  text "GND" at 1.503,54.1 h0.8
  text "SIG" at 4.503,54.1 h0.8
  text "5V" at 7.103,54.1 h0.8
  text "PB1" at 53.772,28.753 h0.8
  text "PA30" at 59.69,28.753 h0.8
  text "GND" at 33.416,27.534 h0.8 r90
  text "GND" at 20.2,15.2 h0.8
Board Outline:
  the board outline again, w0.254

## Dimensions
64,86 to 0,86 on Mechanical 1
65,85 to 65,0 on Mechanical 1

## Text inside footprints (layer, text, board x,y; h text height)
H1: Mechanical 1 "PCB Edge" at 14.85,-0.27 h0.8
H2: Top Overlay "2" at 59.106,62.66 h0.8 r270; Top Overlay "1" at 56.566,62.16 h0.8 r270; Top Overlay "10" at 59.106,49.1 h0.8 r270; Top Overlay "9" at 56.566,49.1 h0.8 r270
U3: Mechanical 13 "*" at 20.93,24.344 h0.8 r180
U10: Top Overlay "NO GND/ / POWER / PLANES / UNDER / OR NEARBY" at 2,76.7 h0.8